# Altium PCB Main.PcbDoc
Units mm, origin at the board's own origin, x right, y up, seen from the top; angles counter-clockwise.
Board outline 50 x 50 mm, 4 copper layers (Top Layer, Ground Layer, Power Layer, Bottom Layer), stack 1.591 mm thick; 21 components, 21 nets, 108 pads, 27 vias.
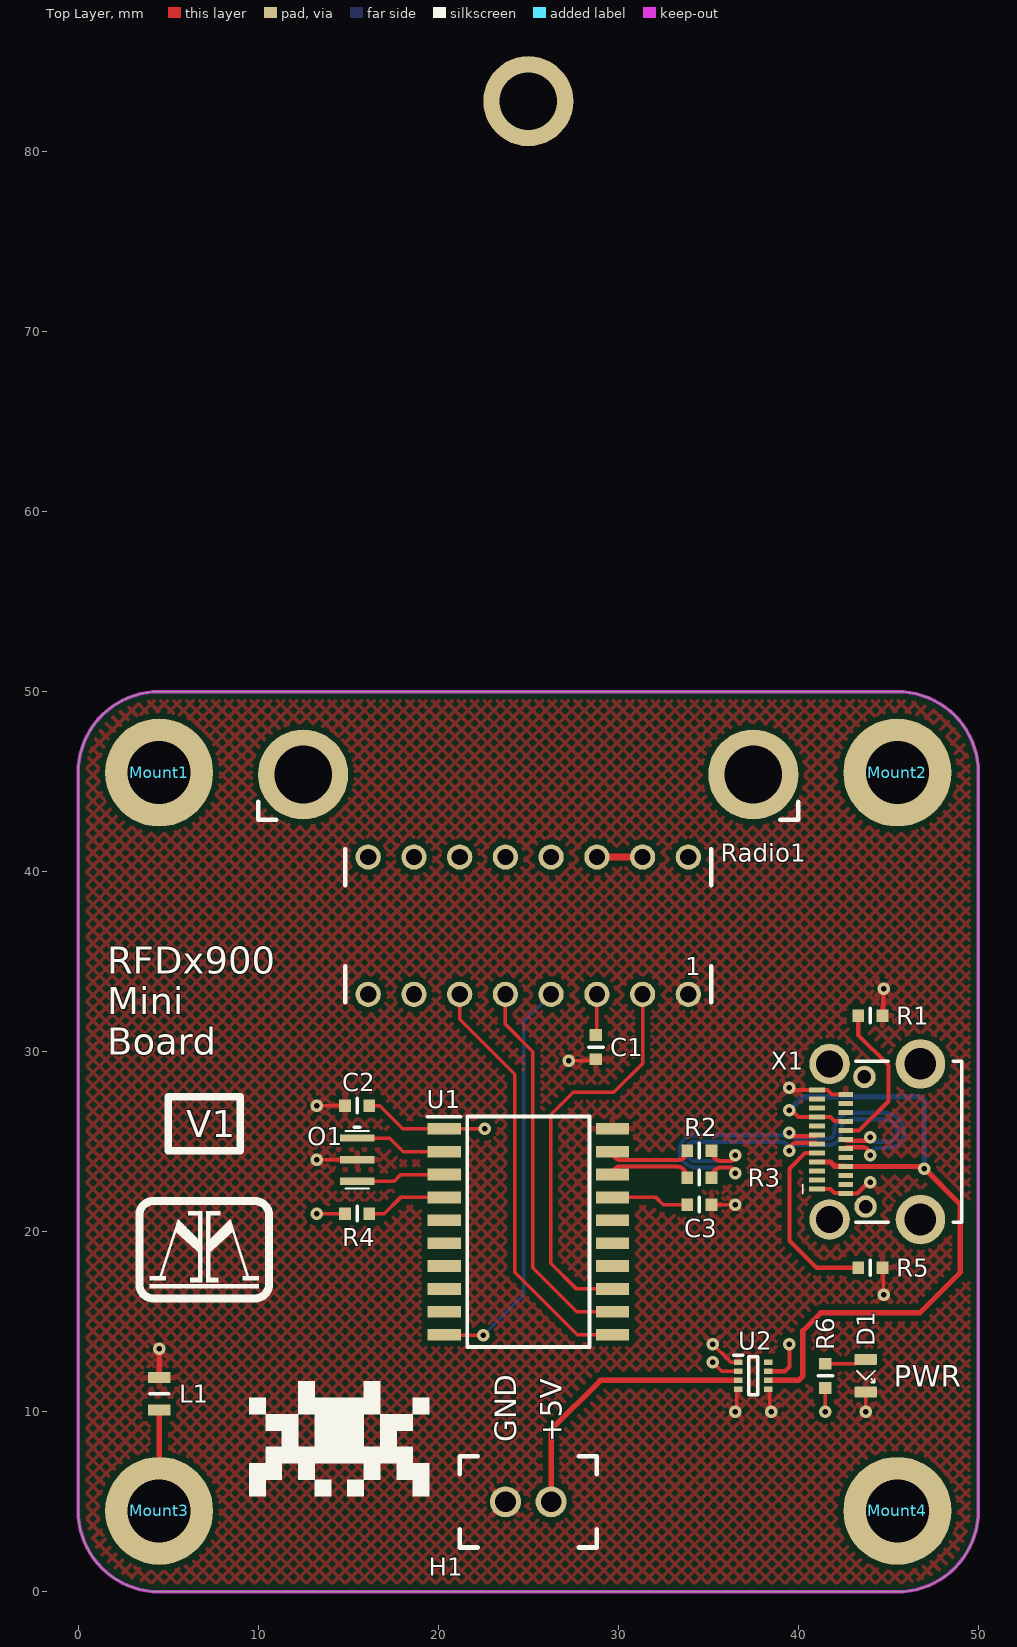
[diagram p0: Top Layer view]
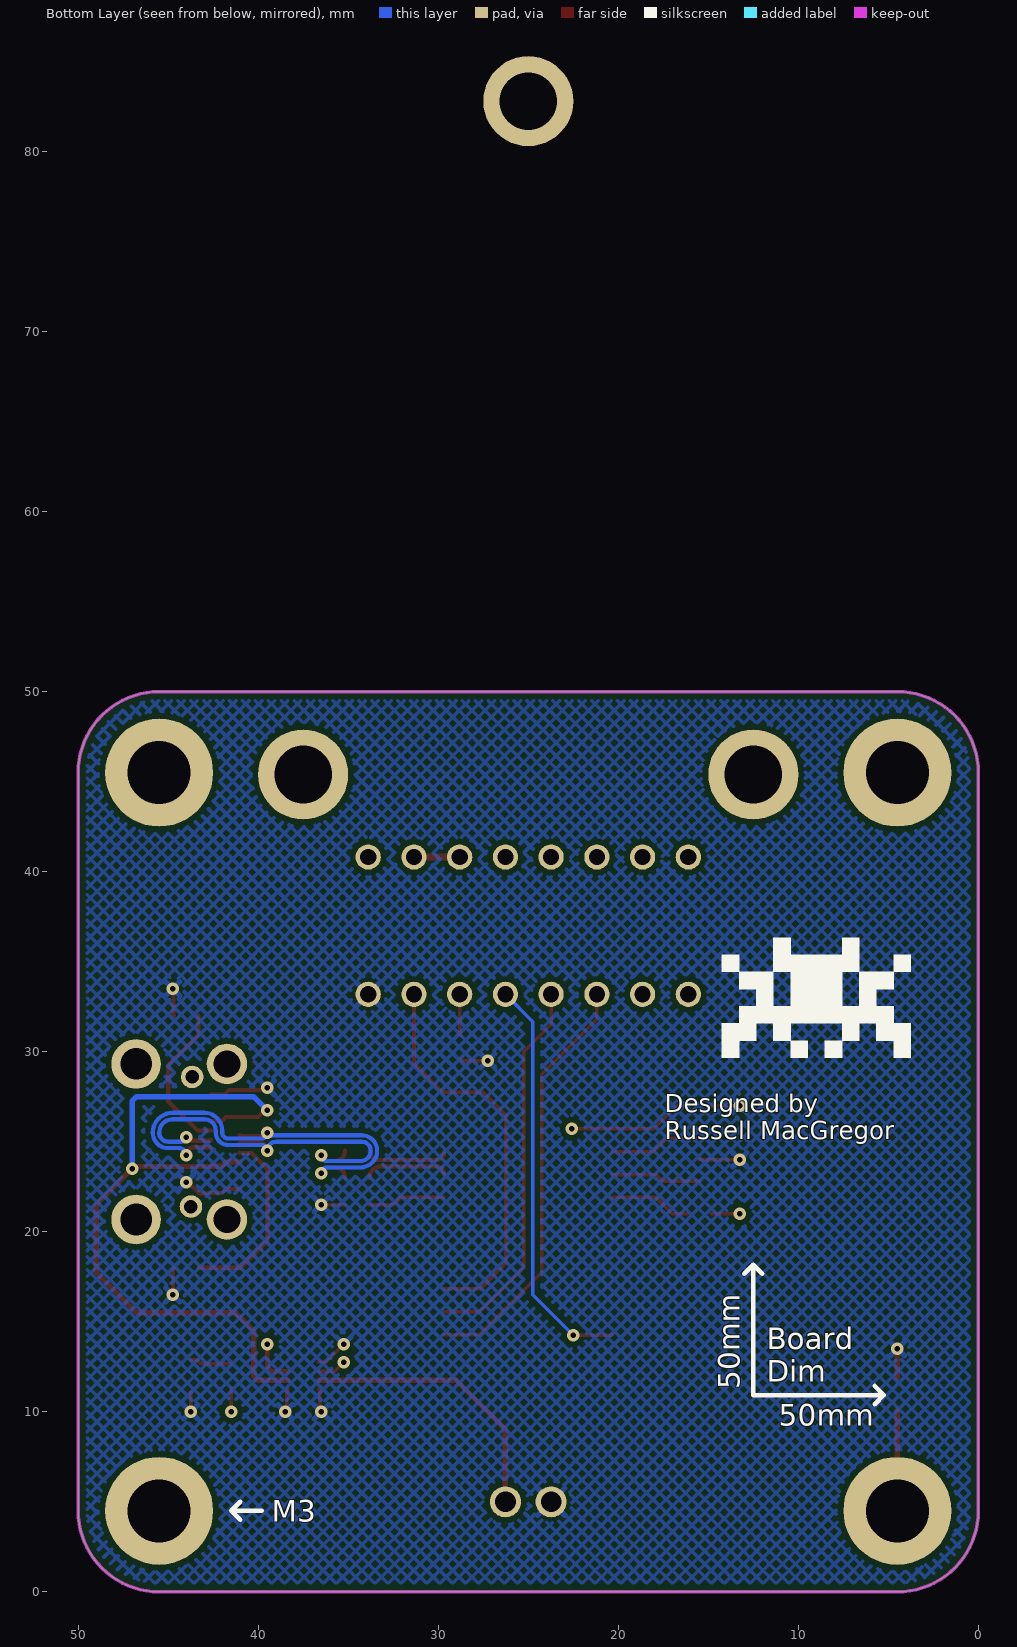
[diagram p1: Bottom Layer view, seen from below]
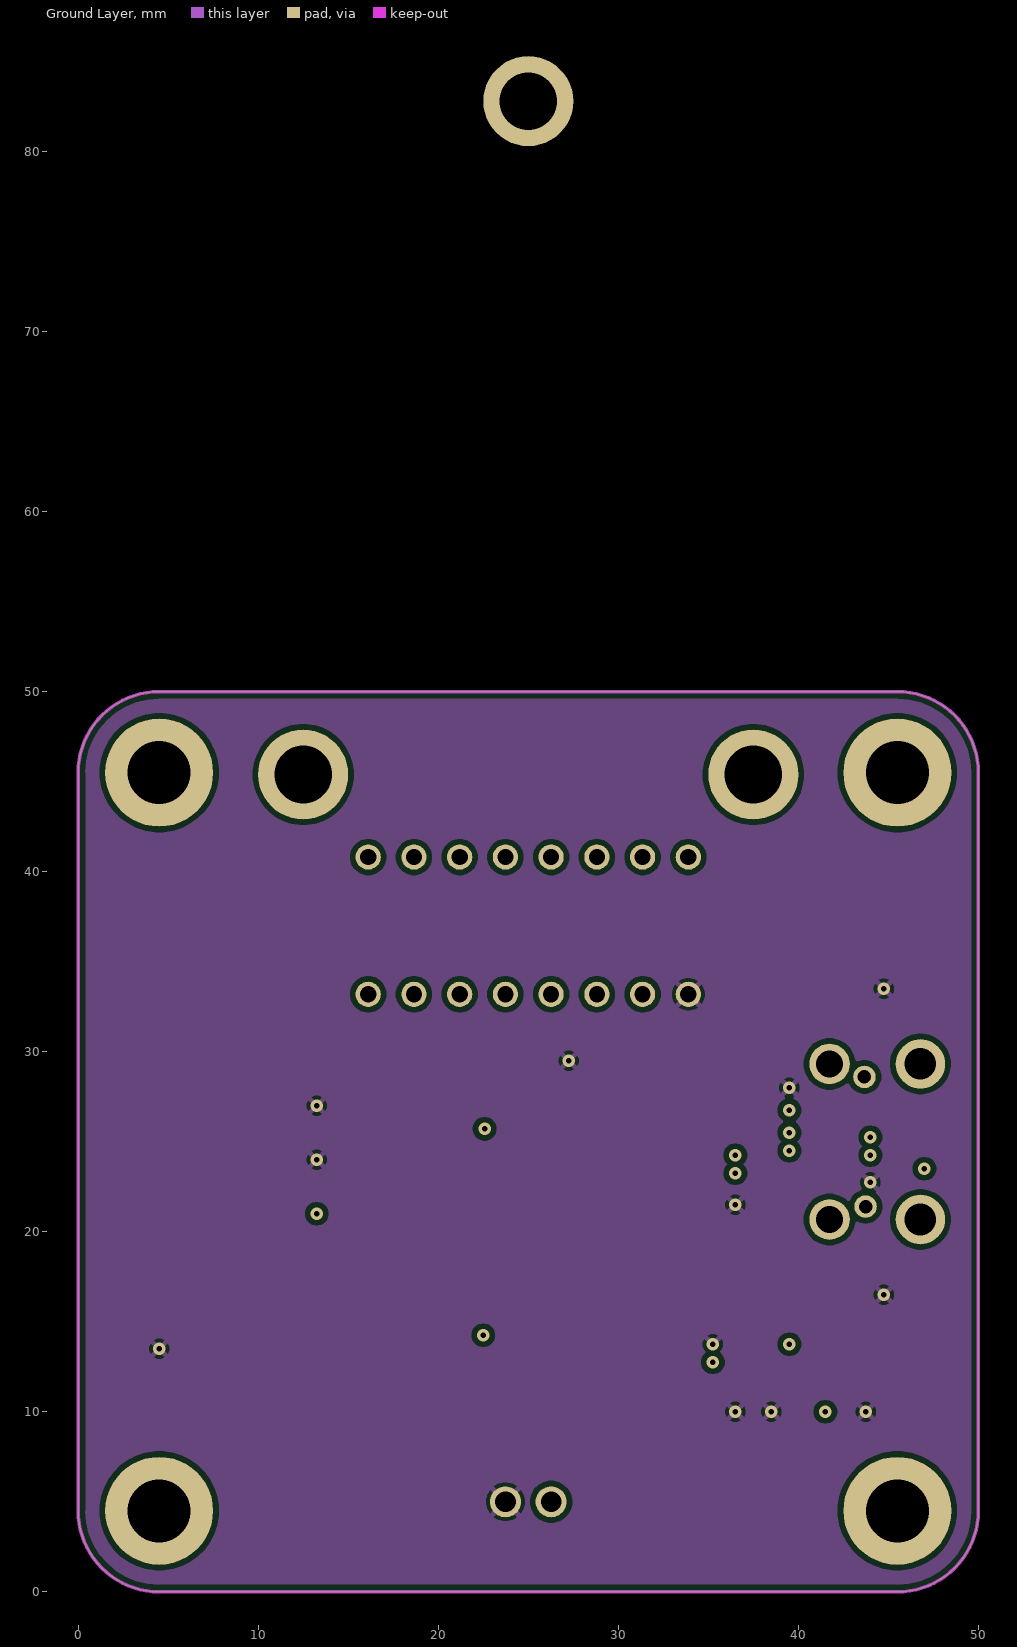
[diagram p2: Ground Layer]
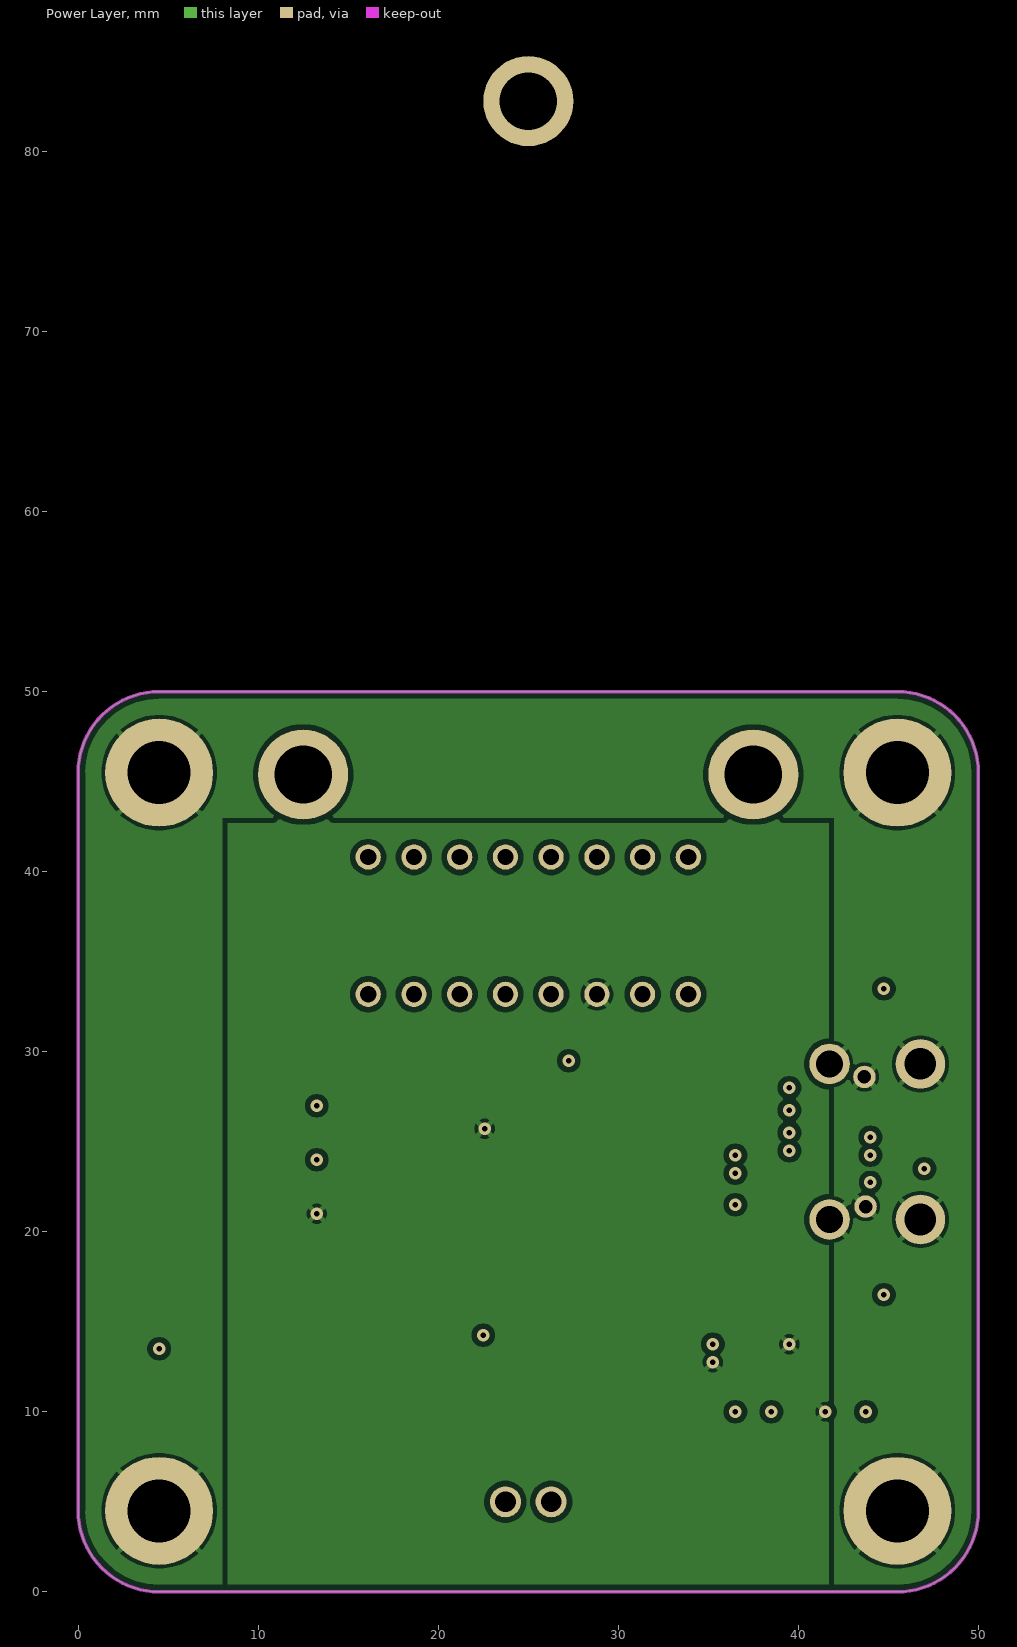
[diagram p3: Power Layer]

## Layer stack, top to bottom
Top Solder: solder mask 0.0102, Solder Resist, Dk 3.8
Top Layer: signal copper 0.035
Dielectric 2: prepreg 0.2104, 7628*1, Dk 4.4
Ground Layer: signal copper 0.0175
Dielectric 1: dielectric 1.065, FR-4, Dk 4.8
Power Layer: signal copper 0.0175
Dielectric 3: prepreg 0.2104, 7628*1, Dk 4.4
Bottom Layer: signal copper 0.035
Bottom Solder: solder mask 0.0102, Solder Resist, Dk 3.8

## Board outline
0,4.5 0,45.5 cw(c4.5,45.5) 4.5,50 45.5,50 cw(c45.5,45.5) 50,45.5 50,4.5 cw(c45.5,4.5) 45.5,0 4.5,0 cw(c4.5,4.5)

## Design rules (kind name [scope] priority, off if disabled: settings)
BoardOutlineClearance [All] p1: gap=0.2 ignorepadtopadclearanceinfootprint=FALSE
Clearance "inPolygon Clearance" [InPolygon] p1: gap=0.3 ignorepadtopadclearanceinfootprint=TRUE // this rule ensures that every net within a polygon of a different net has a set clearance from the poly
Clearance "Different Diff Pair" [All] p2: gap=0.2 ignorepadtopadclearanceinfootprint=TRUE
Clearance "Same Diff Pair" [All] p3: gap=0.1 ignorepadtopadclearanceinfootprint=TRUE
Clearance "Different Nets" [not InAnyDifferentialPair] p4: gap=0.3 ignorepadtopadclearanceinfootprint=TRUE except(0.1: Arc-SMDPad Arc-THPad Arc-Via Arc-Text Track-SMDPad Track-THPad Track-Via Track-Text SMDPad-Text THPad-Text Via-Text Fill-Text Poly-Text Region-Text Text-Text; 0.12: Arc-Arc Arc-Track Track-Track; 0.15: SMDPad-SMDPad SMDPad-THPad SMDPad-Via THPad-THPad THPad-Via Via-Via; 0.2: Arc-Hole Track-Hole SMDPad-Hole THPad-Hole Via-Hole Fill-Hole Poly-Hole Region-Hole Text-Hole)
Clearance "Same Net" [not InAnyDifferentialPair] p5: gap=0 ignorepadtopadclearanceinfootprint=TRUE except(0.1: THPad-Via; 0.18: Arc-Arc Arc-Track Track-Track)
ComponentClearance [All] p1: gap=0.102 collisioncheckmode=3 verticalgap=0.102 showdistances=TRUE
DiffPairsRouting "Ethernet Routing" [InDifferentialPairClass('Ethernet_Pairs')] p1: maxlimit=0.25 minlimit=0.2 mostfreqgap=0.25 toplayer_maxgap=0.2 toplayer_prefgap=0.2 toplayer_minwidth=0.25 toplayer_maxwidth=0.25 toplayer_prefwidth=0.25 midlayer1_mingap=0.25 midlayer1_minwidth=0.19 midlayer1_maxwidth=0.19 midlayer1_prefwidth=0.19 midlayer2_mingap=0.25 midlayer2_minwidth=0.19 midlayer2_maxwidth=0.19 midlayer2_prefwidth=0.19 bottomlayer_maxgap=0.2 bottomlayer_prefgap=0.2 bottomlayer_minwidth=0.25 bottomlayer_maxwidth=0.25 bottomlayer_prefwidth=0.25 impedanceprofiledriven=TRUE maxuncoupledlength=12.7
DiffPairsRouting "USB Routing" [InDifferentialPairClass('USB_Pairs')] p2: maxlimit=0.291 minlimit=0.127 mostfreqgap=0.291 toplayer_maxgap=0.127 toplayer_prefgap=0.127 toplayer_minwidth=0.23 toplayer_maxwidth=0.23 toplayer_prefwidth=0.23 midlayer1_mingap=0.291 midlayer1_minwidth=0.25 midlayer1_maxwidth=0.25 midlayer1_prefwidth=0.25 midlayer2_mingap=0.291 midlayer2_minwidth=0.25 midlayer2_maxwidth=0.25 midlayer2_prefwidth=0.25 bottomlayer_maxgap=0.127 bottomlayer_prefgap=0.127 bottomlayer_minwidth=0.23 bottomlayer_maxwidth=0.23 bottomlayer_prefwidth=0.23 impedanceprofiledriven=TRUE impedanceprofileid={CB3C59B9-2BF9-459C-ABC6-2FEEB21CBF96} impedanceprofilevalue=90.000000 maxuncoupledlength=12.7
DiffPairsRouting "CAN Routing" [InDifferentialPairClass('CAN_Pairs')] p3: maxlimit=0.907 minlimit=0.5 mostfreqgap=0.907 toplayer_maxgap=0.5 toplayer_prefgap=0.5 toplayer_minwidth=0.201 toplayer_maxwidth=0.201 toplayer_prefwidth=0.201 midlayer1_mingap=0.907 midlayer1_minwidth=0.155 midlayer1_maxwidth=0.155 midlayer1_prefwidth=0.155 midlayer2_mingap=0.907 midlayer2_minwidth=0.155 midlayer2_maxwidth=0.155 midlayer2_prefwidth=0.155 bottomlayer_maxgap=0.5 bottomlayer_prefgap=0.5 bottomlayer_minwidth=0.201 bottomlayer_maxwidth=0.201 bottomlayer_prefwidth=0.201 impedanceprofiledriven=TRUE maxuncoupledlength=12.7
Height [All] p1: minheight=0 maxheight=1816.048 prefheight=12.7
HoleSize [All] p1: absolutevalues=TRUE maxlimit=6.3 minlimit=0.3 maxpercent=80.000 minpercent=20.000
HoleToHoleClearance [All] p1: gap=0.25 allowstackedmicrovias=FALSE
Length [All] p1: maxlimit=43.432 minlimit=0 usedelayunits=TRUE mindelay=0.000000 maxdelay=10000.000000
MatchedLengths "Diff Pair Matched Delays" [InDifferentialPairClass('Ethernet_Pairs') or InDifferentialPairClass('USB_Pairs') or InDifferentialPairClass('CAN_Pairs')] p1: tolerance=5 checknetsindiffpair=TRUE checkdiffpairvsdiffpair=FALSE checkxsignals=FALSE checkothers=FALSE usedelayunits=TRUE delaytolerance=100.000000
MinimumAnnularRing [All] p1: minimumring=0.2
MinimumSolderMaskSliver [All] p1: minsoldermaskwidth=0
PlaneClearance "Supply Net Clearance" [InNetClass('Supply_Nets')] p1: clearance=0.5
PlaneClearance "All Nets" [All] p2: clearance=0.3
PolygonConnect "Supply Nets" [InNetClass('Supply_Nets')] p1: connectstyle=Relief reliefconductorwidth=0.3 reliefentries=4 polygonreliefangle="90 Angle" conductorbypadedge=TRUE mindistance=0.2 enablemindistance=FALSE airgapwidth=0.2
PolygonConnect General [All] p2: connectstyle=Relief reliefconductorwidth=0.254 reliefentries=4 polygonreliefangle="90 Angle" airgapwidth=0.254
RoutingVias [All] p1: holewidth=0.2 width=0.35 viastyle="Through Hole" minholewidth=0.15 minwidth=0.3 maxholewidth=6.3 maxwidth=6.55
SilkToSilkClearance [All] p1: silktosilkclearance=0
SilkToSolderMaskClearance [All] p1: minsilkscreentomaskgap=0 clearancetoexposedcopper=TRUE
SolderMaskExpansion [All] p1: expansion=0.075 istentingtop=FALSE
SupplyNets "Schematic Supply Nets" [InNet('+5V')] p1: voltage=0.000
SupplyNets "Schematic Supply Nets_3" [InNet('GND')] p2: voltage=0.000
SupplyNets "Schematic Supply Nets_1" [InNet('Earth')] p3: voltage=0.000
UnRoutedNet [All] p1: checkbadconnections=TRUE
Width "nRF Width" [InNetClass('nRF Signal')] p1: maxlimit=0.379 minlimit=0.263 preferedwidth=0.379 toplayer_minwidth=0.379 midlayer1_maxwidth=0.263 midlayer1_prefwidth=0.263 midlayer2_maxwidth=0.263 midlayer2_prefwidth=0.263 bottomlayer_minwidth=0.379 impedanceprofiledriven=TRUE minimp=50.000000 maximp=50.000000 favimp=50.000000 checkconnectedcopper=TRUE
Width [All] p2: maxlimit=100 minlimit=0.1 preferedwidth=0.3
20 further rules are at their usual default settings.

## Classes and differential pairs
differential pair class USB_Pairs: USB_D USB_DX
net class Supply_Nets: +5V +5V_PWR_Board +5V_USB Earth GND NetU2_8
differential pair USB_DX: +USB_DX_P -USB_DX_N
differential pair USB_D: +USB_D_P -USB_D_N

## Components (designator, comment, footprint, x,y, rotation, side; value= is the part's Value field where it differs from the comment)
C1 "[Cap] SMD Nonpolarized" "[Cap] SMD 0603" 28.75,30.25 r90 top (schematic designator C3)
C2 "[Cap] SMD Nonpolarized" "[Cap] SMD 0603" 15.5,27 r0 top
C3 "[Cap] SMD Nonpolarized" "[Cap] SMD 0603" 34.5,21.5 r180 top (schematic designator C1)
D1 "SMD LED" "[LED] SMD 0805" 43.75,12 r270 top
H1 "1x2 Male" "[Header] Shrouded 1x2 Male" 25,5 r180 top
L1 "652-MH2029-300Y" "[Ferrite] SMD Bead 0805 (1)" 4.5,11 r90 top
Mount1 "M3 Mount Hole" "[Mount] M3 Mount Hole" 4.5,45.5 r0 top
Mount2 "M3 Mount Hole" "[Mount] M3 Mount Hole" 45.5,45.5 r0 top
Mount3 "M3 Mount Hole" "[Mount] M3 Mount Hole" 4.5,4.5 r0 top
Mount4 "M3 Mount Hole" "[Mount] M3 Mount Hole" 45.5,4.5 r0 top
O1 "[XOSC] SMD 12MHz" "[XOSC] SMD 12MHz" 15.5,24 r270 top
R1 "[Res] SMD Resistor" "[Res] SMD 0603" 44,32 r0 top (schematic designator R5)
R2 "[Res] SMD Resistor" "[Res] SMD 0603" 34.5,24.5 r180 top
R3 "[Res] SMD Resistor" "[Res] SMD 0603" 34.5,23 r180 top
R4 "[Res] SMD Resistor" "[Res] SMD 0603" 15.5,21 r180 top (schematic designator R1)
R5 "[Res] SMD Resistor" "[Res] SMD 0603" 44,18 r180 top (schematic designator R4)
R6 "[Res] SMD Resistor" "[Res] SMD 0603" 41.5,12 r270 top
Radio1 "RFDX900" "[Device] RFDX900 Radio" 25,37 r0 top
U1 "USB-UART Bridge" "[IC] USB-UART Bridge" 25,20 r0 top
U2 "PWR ORing" "[IC] Power ORing Controller" 37.5,12 r0 top
X1 "USB-C" "[Port] USB-C" 45,25 r90 top

## Footprints (in the part's own frame and the unit in brackets; to place one, negate y for a bottom-side part, rotate by r counter-clockwise, add the part's x,y. Pads: shape width x height; smd on the part's side, far side on the other; paste and mask are expansions set on the pad)
"[Cap] SMD 0603" [mm]
  rect 0.65x0.7 smd: 1(-0.675,0) 2(0.675,0)
  silkscreen extent 0,-0.4 0,0.4, body extent -0.8,-0.45 0.8,0.45, height 0.8
"[Device] RFDX900 Radio" [mm] "RFDX900 Long-Range RF Module"
  round 1.4 hole 0.9: 1(8.89,-3.81) 2(8.89,3.81) 3(6.35,-3.81) 4(6.35,3.81) 5(3.81,-3.81) 6(3.81,3.81) 7(1.27,-3.81) 8(1.27,3.81) 9(-1.27,-3.81) 10(-1.27,3.81) 11(-3.81,-3.81) 12(-3.81,3.81) 13(-6.35,-3.81) 14(-6.35,3.81) 15(-8.89,-3.81) 16(-8.89,3.81)
  round 5 hole 3.2: X(-12.5,8.395) X(0,45.795) X(12.5,8.395)
  silkscreen extent -15,-4.25 15,6.9, body extent -15,-4.25 15,100.2, height 12.75
"[Ferrite] SMD Bead 0805 (1)" [mm]
  rect 0.6x1.25 smd: 1(-0.9,0) 2(0.9,0)
  silkscreen extent 0,-0.53 0,0.53, body extent -1,-0.6 1,0.6, height 1.1
"[Header] Shrouded 1x2 Male" [mm]
  round 1.725 hole 1.15: 1(-1.27,0) 2(1.27,0)
  silkscreen extent -3.81,-2.54 3.81,2.54, body extent -3.68,-2.54 3.68,4.06, height 11.71
"[IC] Power ORing Controller" [mm]
  rect 0.475x0.3 smd: 1(-0.838,0.75) 2(-0.838,0.25) 3(-0.838,-0.25) 4(-0.838,-0.75) 5(0.838,-0.75) 6(0.838,-0.25) 7(0.838,0.25) 8(0.838,0.75)
  silkscreen extent -1.07,-1.05 0.25,1.15, body extent -0.8,-1.02 0.8,1.08, height 0.6
"[IC] USB-UART Bridge" [mm]
  rect 1.85x0.65 smd: 1(-4.675,5.715) 2(-4.675,4.445) 3(-4.675,3.175) 4(-4.675,1.905) 5(-4.675,0.635) 6(-4.675,-0.635) 7(-4.675,-1.905) 8(-4.675,-3.175) 9(-4.675,-4.445) 10(-4.675,-5.715) 11(4.675,-5.715) 12(4.675,-4.445) 13(4.675,-3.175) 14(4.675,-1.905) 15(4.675,-0.635) 16(4.675,0.635) 17(4.675,1.905) 18(4.675,3.175) 19(4.675,4.445) 20(4.675,5.715)
  silkscreen extent -5.6,-6.4 3.4,6.4, body extent -5.15,-6.4 5.15,6.4, height 2.65
"[LED] SMD 0805" [mm]
  rrect20% 0.6x1.25 smd: 1(-0.9,0) 2(0.9,0)
  silkscreen extent -0.28,-0.51 0.37,0.51, body extent -1,-0.65 1,0.65, height 0.8
"[Mount] M3 Mount Hole" [mm] "Place at least 4.5mm from board edge. Plated."
  round 6 hole 3.5: 1(0,0)
"[Port] USB-C" [mm]
  rect 0.27x0.9 smd: A1(-2.625,3.965) A2(-2.125,3.965) A3(-1.625,3.965) A4(-1.125,3.965) A5(-0.625,3.965) A6(-0.125,3.965) A7(0.375,3.965) A8(0.875,3.965) A9(1.375,3.965) A10(1.875,3.965) A11(2.375,3.965) A12(2.875,3.965)
  rect 0.27x0.8 smd: B1(2.625,2.365) B2(2.125,2.365) B3(1.625,2.365) B4(1.125,2.365) B5(0.625,2.365) B6(0.125,2.365) B7(-0.375,2.365) B8(-0.875,2.365) B9(-1.375,2.365) B10(-1.875,2.365) B11(-2.375,2.365) B12(-2.875,2.365)
  round 2.75 hole 1.75: MH(-4.32,-1.785) MH(4.32,-1.785)
  round 2.25 hole 1.5: MH(-4.32,3.265) MH(4.32,3.265)
  round 1.25 hole 0.75: MH(-3.6,1.265) MH(3.6,1.33)
  silkscreen extent -4.47,-4.09 4.47,4.75, body extent -4.51,-4.16 4.43,4.01, height 2.92
"[Res] SMD 0603" [mm]
  rect 0.65x0.7 smd: 1(-0.675,0) 2(0.675,0)
  silkscreen extent 0,-0.4 0,0.4, body extent -0.8,-0.45 0.8,0.45, height 0.8
"[XOSC] SMD 12MHz" [mm]
  rect 0.4x1.9 smd: 1(-1.2,0) 2(0,0) 3(1.2,0)
  silkscreen extent -1.8,-0.65 1.6,0.65, body extent -1.6,-0.65 1.6,0.65, height 0.8

## Part data
C1 C2 C3: Capacitance=100nF, Size Package=0603, Supplier Part Number 1=311-1088-6-ND, Tolerance=5%, Voltage=6.3V, Supplier 1=DigiKey
D1: library part "[LED] SMD", "Generic", Color=Green, Size Package=0805, Supplier Part Number 1=475-LGR971-KN-1DKR-ND, Supplier 1=DigiKey
H1: library part "[Header] Shrouded 1x2 Male", "0705430036 / Mates with 0050579402", Supplier Part Number 1=WM4824-ND, Supplier 1=DigiKey, Supplier 2=DigiKey, Supplier Part Number 2=WM2900-ND
L1: library part "[Ferrite] SMD Ferrite Bead (1)", Res @ Freq="30 @ 100MHz", Size Package=0805, Supplier Part Number 1=MH2029-300YCT-ND, Supplier 1=DigiKey
Mount1 Mount2 Mount3 Mount4: library part "[Mount] M3 Mount Hole", "Place at least 4.5mm from board edge. Plated."
O1: Supplier Part Number 1=490-17947-1-ND, Supplier 1=DigiKey
R1 R5: "Generic", Resistance=5.1k, Size Package=0603, Supplier Part Number 1=311-5.10KHRDKR-ND, Tolerance=1%, Supplier 1=DigiKey
R2 R3: "Generic", Resistance=27, Size Package=0603, Supplier Part Number 1=749-1631-1-ND, Tolerance=1%, Supplier 1=DigiKey
R4: "Generic", Resistance=10k, Size Package=0603, Supplier Part Number 1=311-10.0KHRDKR-ND, Tolerance=5%, Supplier 1=DigiKey
R6: "Generic", Resistance=220, Size Package=0603, Supplier Part Number 1=A129741CT-ND, Tolerance=5%, Supplier 1=DigiKey
Radio1: library part "[Device] RFDX900 Radio", "RFDX900 Long-Range RF Module", Supplier Part Number 1=609-71609-308LF-ND, Supplier 1=DigiKey
U1: library part "[IC] USB-UART Bridge", "MCP2200T-I/SO", Supplier Part Number 1=MCP2200T-I/SOCT-ND, Supplier 1=DigiKey
U2: library part "[IC] Power ORing Controller", Supplier Part Number 1=296-LM66200DRLRCT-ND, Supplier 1=DigiKey
X1: library part "[Port] USB Type-C", Supplier Part Number 1=670-3104-1-ND, Supplier 1=DigiKey

## Via types
v1: diameter 0.7, hole 0.3, Top Layer to Bottom Layer, 27 vias

## Nets (pads, with @x,y where several pads share a name; then routed paths per layer and width w, separated by ;. In a path a pad name is that pad's centre, name@x,y a point inside that pad or via, vN(x,y) a via of type N, cw(c..) or ccw(c..) an arc to the next point about the centre after c; other vN are vias at no path point)
+5V: C1.2 C2.2 R4.2 R6.2 Radio1.5 U1.1 U2.2 U2.7 | length 16.3
  Top Layer w0.2: v1(13.25,21) R4.2 ; C2.2 16.75,27 18.035,25.715 U1.1 v1(22.575,25.715) ; C1.2 28.81,30.985 Radio1.5 ; v1(35.25,12.75) 35.75,12.25 U2.2 ; v1(41.5,10) R6.2
  Top Layer w0.23: U2.7 39.25,12.25 39.5,12.5 v1(39.5,13.75)
+5V_PWR_Board: H1.1 U2.3 | length 15.5
  Top Layer w0.3: H1.1 26.27,9.02 29,11.75 U2.3
+5V_USB: U2.6 X1.A4 X1.A9 X1.B4 X1.B9 | length 42.4
  Top Layer w0.23: v1(39.5,26.75) 39.627,26.75 40.002,26.375 X1.A9 41.78,26.375 42.01,26.145 42.615,26.145 X1.B4
  Top Layer w0.3: U2.6 40,11.75 40.25,12 40.25,14.5 41.25,15.5 46.75,15.5 49,17.75 49,21.5 v1(47,23.5) 46.873,23.5 46.748,23.625 X1.B9 42.615,23.645 42.01,23.645 41.78,23.875 X1.A4
  Bottom Layer w0.3: v1(39.5,26.75) 40.25,27.5 46.75,27.5 47,27.25 v1(47,23.5)
Earth: L1.1 Mount1.1 Mount2.1 Mount3.1 Mount4.1 X1.MH | length 5.6
  Top Layer w0.3: Mount3.1 L1.1
GND: C1.1 C2.1 C3.1 D1.2 H1.2 L1.2 O1.2 R1.2 R5.1 Radio1.1 U1.20 U2.1 U2.4 U2.5 X1.A1 X1.A12 X1.B1 X1.B12 | length 23.6
  Top Layer w0.2: v1(13.25,24) O1.2 ; v1(13.25,27) C2.1 ; v1(27.25,29.5) 28.675,29.5 C1.1 ; C3.1 v1(36.5,21.5) ; v1(35.25,13.75) 36.25,12.75 U2.1 ; v1(36.5,10) 36.581,10.081 36.581,11.2 36.631,11.25 U2.4 ; U2.5 38.369,11.25 38.419,11.2 38.419,10.081 v1(38.5,10) ; v1(43.75,10) D1.2 ; R5.1 44.712,17.963 44.712,16.538 v1(44.75,16.5)
  Top Layer w0.23: v1(39.5,28) 39.627,28 39.752,27.875 X1.A12 X1.A12 41.626,27.874 41.875,27.625 X1.B1 ; X1.A1 41.78,22.375 42.01,22.145 42.615,22.145 X1.B12 43.272,22.125 43.897,22.75 v1(44,22.75) ; R1.2 44.712,32.037 44.712,33.462 v1(44.75,33.5)
  Top Layer w0.3: L1.2 v1(4.5,13.5)
NetC3_2: C3.2 U1.17 | length 4.3
  Top Layer w0.2: U1.17 32.095,21.905 32.5,21.5 C3.2
NetD1_1: D1.1 R6.1 | length 2.3
  Top Layer w0.2: R6.1 43.2,12.675 43.425,12.9 D1.1
NetR1_1: R1.1 X1.B5 | length 8.5
  Top Layer w0.23: X1.B5 43.375,25.625 45,27.25 45,29.25 43.325,30.925 R1.1
NetR5_2: R5.2 X1.A5 | length 10.3
  Top Layer w0.23: X1.A5 40.375,24.375 39.5,23.5 39.5,19.5 41,18 R5.2
NetRadio1_4: Radio1.4 Radio1.6 | length 2.5
  Top Layer w0.4: Radio1.6 Radio1.4
OSC1: O1.1 U1.2 | length 5.1
  Top Layer w0.2: O1.1 17.3,25.2 18.055,24.445 U1.2
OSC2: O1.3 U1.3 | length 5
  Top Layer w0.2: O1.3 17.55,22.8 17.925,23.175 U1.3
"Radio CTS": Radio1.11 U1.11 | length 23.6
  Top Layer w0.2: Radio1.11 21.19,31.81 24.25,28.75 24.25,17.75 27.715,14.285 U1.11
"Radio RTS": Radio1.3 U1.13 | length 22.4
  Top Layer w0.2: U1.13 27.675,16.825 26.25,18.25 26.25,26.5 27.5,27.75 29.75,27.75 31.35,29.35 Radio1.3
"Radio RX": Radio1.7 U1.10 | length 22.7
  Top Layer w0.2: U1.10 20.36,14.25 v1(22.5,14.25)
  Bottom Layer w0.2: v1(22.5,14.25) 24.75,16.5 24.75,31.67 Radio1.7
"Radio TX": Radio1.9 U1.12 | length 21.3
  Top Layer w0.2: Radio1.9 23.73,31.52 25.25,30 25.25,18 27.695,15.555 U1.12
USB-UART_RESET: R4.1 U1.4 | length 4.5
  Top Layer w0.2: R4.1 17,21 17.905,21.905 U1.4
USB_D_N: R3.1 X1.A7 X1.B7 | length 26.3
  Top Layer w0.23: R3.1 cw(c35.746,23) 35.746,23.571 36.179,23.571 cw(c36.179,23.25) v1(36.5,23.25) ; v1(39.5,25.5) ccw(c39.696,25.5) 39.696,25.304 40.964,25.304 ccw(c40.964,25.375) X1.A7 ; X1.B7 cw(c42.706,24.625) 42.706,24.696 43.554,24.696 cw(c43.554,24.25) v1(44,24.25)
  Bottom Layer w0.23: v1(36.5,23.25) ccw(c36.179,23.25) 36.179,23.571 34.321,23.571 cw(c34.321,24.5) 33.393,24.5 cw(c34.25,24.5) 34.25,25.357 39.357,25.357 ccw(c39.357,25.5) v1(39.5,25.5) ccw(c39.821,25.5) 39.821,25.179 41.679,25.179 ccw(c41.679,25.5) 42,25.5 42,25.607 cw(c43,25.607) 43,26.607 44.75,26.607 cw(c44.75,25.5) 45.857,25.5 cw(c45,25.5) 45,24.643 44.393,24.643 ccw(c44.393,24.25) v1(44,24.25)
USB_D_P: R2.1 X1.A6 X1.B6 | length 24.2
  Top Layer w0.23: R2.1 ccw(c35.746,24.5) 35.746,23.929 36.179,23.929 ccw(c36.179,24.25) v1(36.5,24.25) ; v1(39.5,24.5) cw(c39.946,24.5) 39.946,24.946 40.964,24.946 cw(c40.964,24.875) X1.A6 ; X1.B6 ccw(c42.706,25.125) 42.706,25.054 43.804,25.054 ccw(c43.804,25.25) v1(44,25.25)
  Bottom Layer w0.23: v1(36.5,24.25) cw(c36.179,24.25) 36.179,23.929 34.321,23.929 cw(c34.321,24.5) 33.75,24.5 cw(c34.25,24.5) 34.25,25 39,25 cw(c39,24.5) v1(39.5,24.5) cw(c39.821,24.5) 39.821,24.821 41.679,24.821 ccw(c41.679,25.5) 42.357,25.5 42.357,25.607 cw(c43,25.607) 43,26.25 44.75,26.25 cw(c44.75,25.5) 45.5,25.5 cw(c45,25.5) 45,25 44.25,25 cw(c44.25,25.25) v1(44,25.25)
USB_DX_N: R3.2 U1.18 | length 4.8
  Top Layer w0.23: U1.18 cw(c30.131,23.175) 30.131,23.631 33.194,23.631 cw(c33.194,23) R3.2
USB_DX_P: R2.2 U1.19 | length 4.7
  Top Layer w0.23: U1.19 ccw(c30.131,24.445) 30.131,23.989 33.314,23.989 ccw(c33.314,24.5) R2.2
pads on no net: Radio1.2 Radio1.8 Radio1.10 Radio1.12 Radio1.13 Radio1.14 Radio1.15 Radio1.16 Radio1.X U1.5 U1.6 U1.7 U1.8 U1.9 U1.14 U1.15 U1.16 U2.8 X1.A2 X1.A3 X1.A8 X1.A10 X1.A11 X1.B2 X1.B3 X1.B8 X1.B10 X1.B11

## Polygon pours and split planes (outlines as drawn)
+5V on Power Layer "+5V Power Poly" (solid, remove dead copper, pour order 1): 8,0 8,43 42,43 42,0
Earth on Power Layer "Earth Power Poly" (solid, remove dead copper, pour order 0): 8,0 0,0 0,50 50,50 50,0 42,0 42,43 8,43
GND on Ground Layer "GND Poly" (solid, remove dead copper, pour order 2): 0,0 0,50 50,50 50,0
GND on Top Layer "Top GND Poly" (hatched 45Degree grid 0.508 track 0.203, remove dead copper, pour order 3): 0,0 0,50 50,50 50,0
GND on Bottom Layer "Bottom GND Poly" (hatched 45Degree grid 0.508 track 0.203, remove dead copper, pour order 4): 0,0 0,50 50,50 50,0

## Keep-outs
Keep-Out Layer:
  the board outline again, w0.2

## Silkscreen, mask and mechanical layers (free items; w line width, h text height)
Top Overlay:
  drawing of 13 lines, arcs and shapes, not listed
  text "RFDx900 / Mini / Board" at 1.602,29.841 h1.5
  text "V1" at 6,25.25 h1.5
  text "PWR" at 45.3,11.4 h1.2
  text "GND" at 24.33,8.3 h1.2 r90
  text "+5V" at 26.87,8.3 h1.2 r90
Bottom Overlay:
  region: 7.925,29.659 7.568,29.659 7.568,30.614 8.521,30.614 8.521,30.613 8.523,30.613 8.523,29.659 7.926,29.659
  region: 3.75,35.119 3.75,35.387 4.703,35.387 4.703,35.385 4.704,35.385 4.704,34.432 3.75,34.432 3.75,35.118
  region: 13.295,34.726 13.295,35.385 13.296,35.385 13.296,35.387 14.25,35.387 14.25,34.432 13.295,34.432 13.295,34.725
  region: 10.432,30.538 10.432,29.659 9.477,29.659 9.477,30.613 9.478,30.613 9.478,30.614 10.432,30.614 10.432,30.539
  region: 6.63,36.341 7.568,36.341 7.568,35.387 10.432,35.387 10.432,36.341 11.386,36.341 11.386,34.432 10.432,34.432 10.432,32.523 11.386,32.523 11.386,34.432 13.295,34.432 13.295,33.479 13.294,33.479 13.294,33.478 12.341,33.478 12.341,32.523 13.294,32.523 13.294,32.522 13.295,32.522 13.295,31.568 14.25,31.568 14.25,29.659 13.295,29.659 13.295,30.614 12.342,30.614 12.342,30.615 12.341,30.615 12.341,31.568 11.386,31.568 11.386,30.615 11.385,30.615 11.385,30.614 10.432,30.614 10.432,31.568 7.568,31.568 7.568,30.614 6.615,30.614 6.615,30.615 6.613,30.615 6.613,31.568 5.659,31.568 5.659,30.615 5.658,30.615 5.658,30.614 4.704,30.614 4.704,29.659 3.75,29.659 3.75,31.568 4.704,31.568 4.704,32.522 4.706,32.522 4.706,32.523 5.659,32.523 5.659,33.478 4.706,33.478 4.706,33.479 4.704,33.479 4.704,34.432 6.613,34.432 6.613,32.523 7.568,32.523 7.568,34.432 6.613,34.432 6.613,36.341 6.629,36.341
  lines w0.254: 5.25,10.932 5.758,10.424 ; 5.758,11.432 5.25,10.924 12.5,10.924 12.5,18.174 13.008,17.666 ; 12,17.666 12.508,18.174 ; 39.8,4.5 41.5,4.5 40.992,5.008 ; 40.992,4 41.5,4.508
  text "Designed by / Russell MacGregor" at 17.422,25.127 h1
  text "Board" at 11.75,13.474 h1.2
  text "Dim" at 11.75,11.674 h1.2
  text "50mm" at 13.25,11.25 h1.2 r270
  text "50mm" at 11.074,9.224 h1.2
  text "M3" at 39.25,3.9 h1.2
Poly Planning:
  lines w0.2: 0,0 0,50 50,50 50,0 42,0 42,43 8,43 8,0 0,0

## Text inside footprints (layer, text, board x,y; h text height)
Radio1: Top Overlay "1" at 33.723,34.25 h1